# Altium PCB 28Pins_Schematic_V1I1_PCB.PcbDoc (part 1 of 5)
Units mm, origin at the board's own origin, x right, y up, seen from the top; angles counter-clockwise.
Board outline 68.58 x 53.34 mm, 2 copper layers (L1, L2), stack 1.67 mm thick; 106 components, 72 nets, 323 pads, 86 vias.
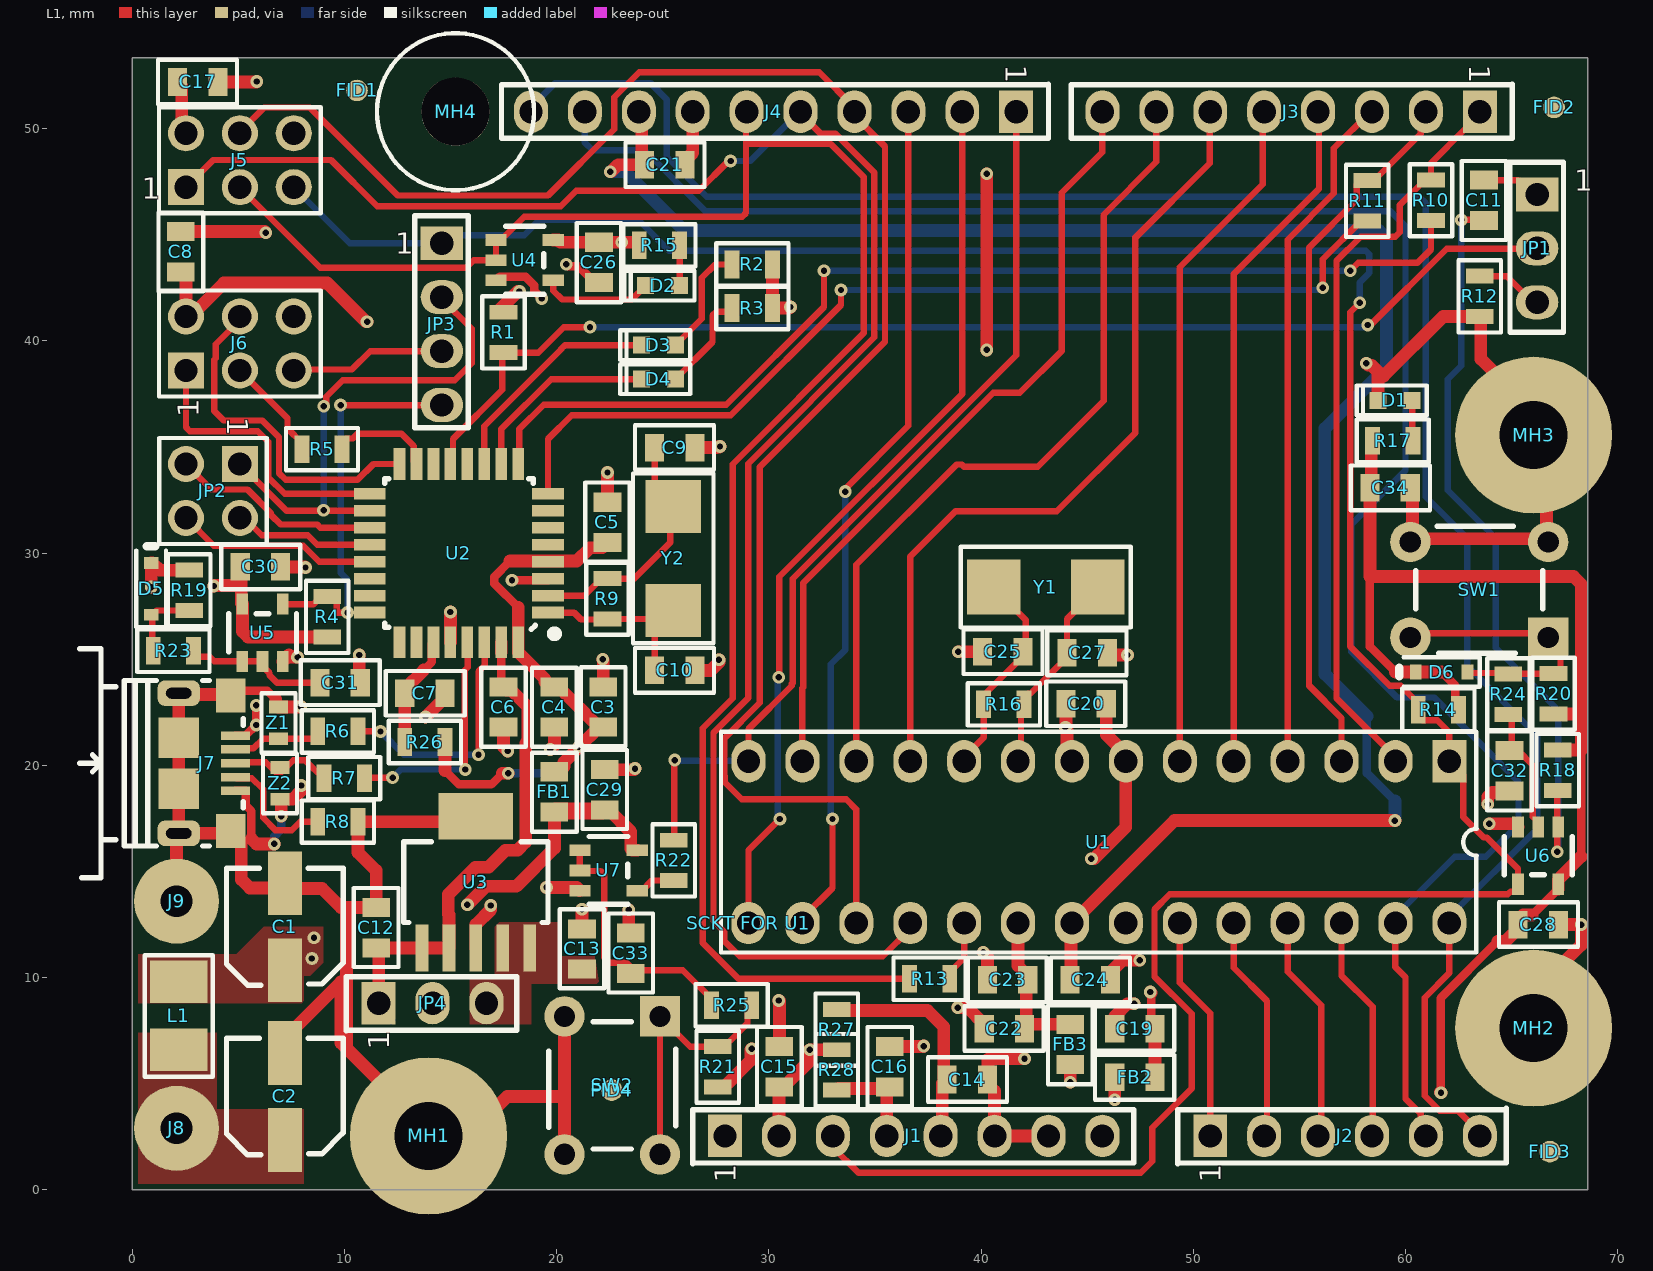
[diagram p0: L1 view]
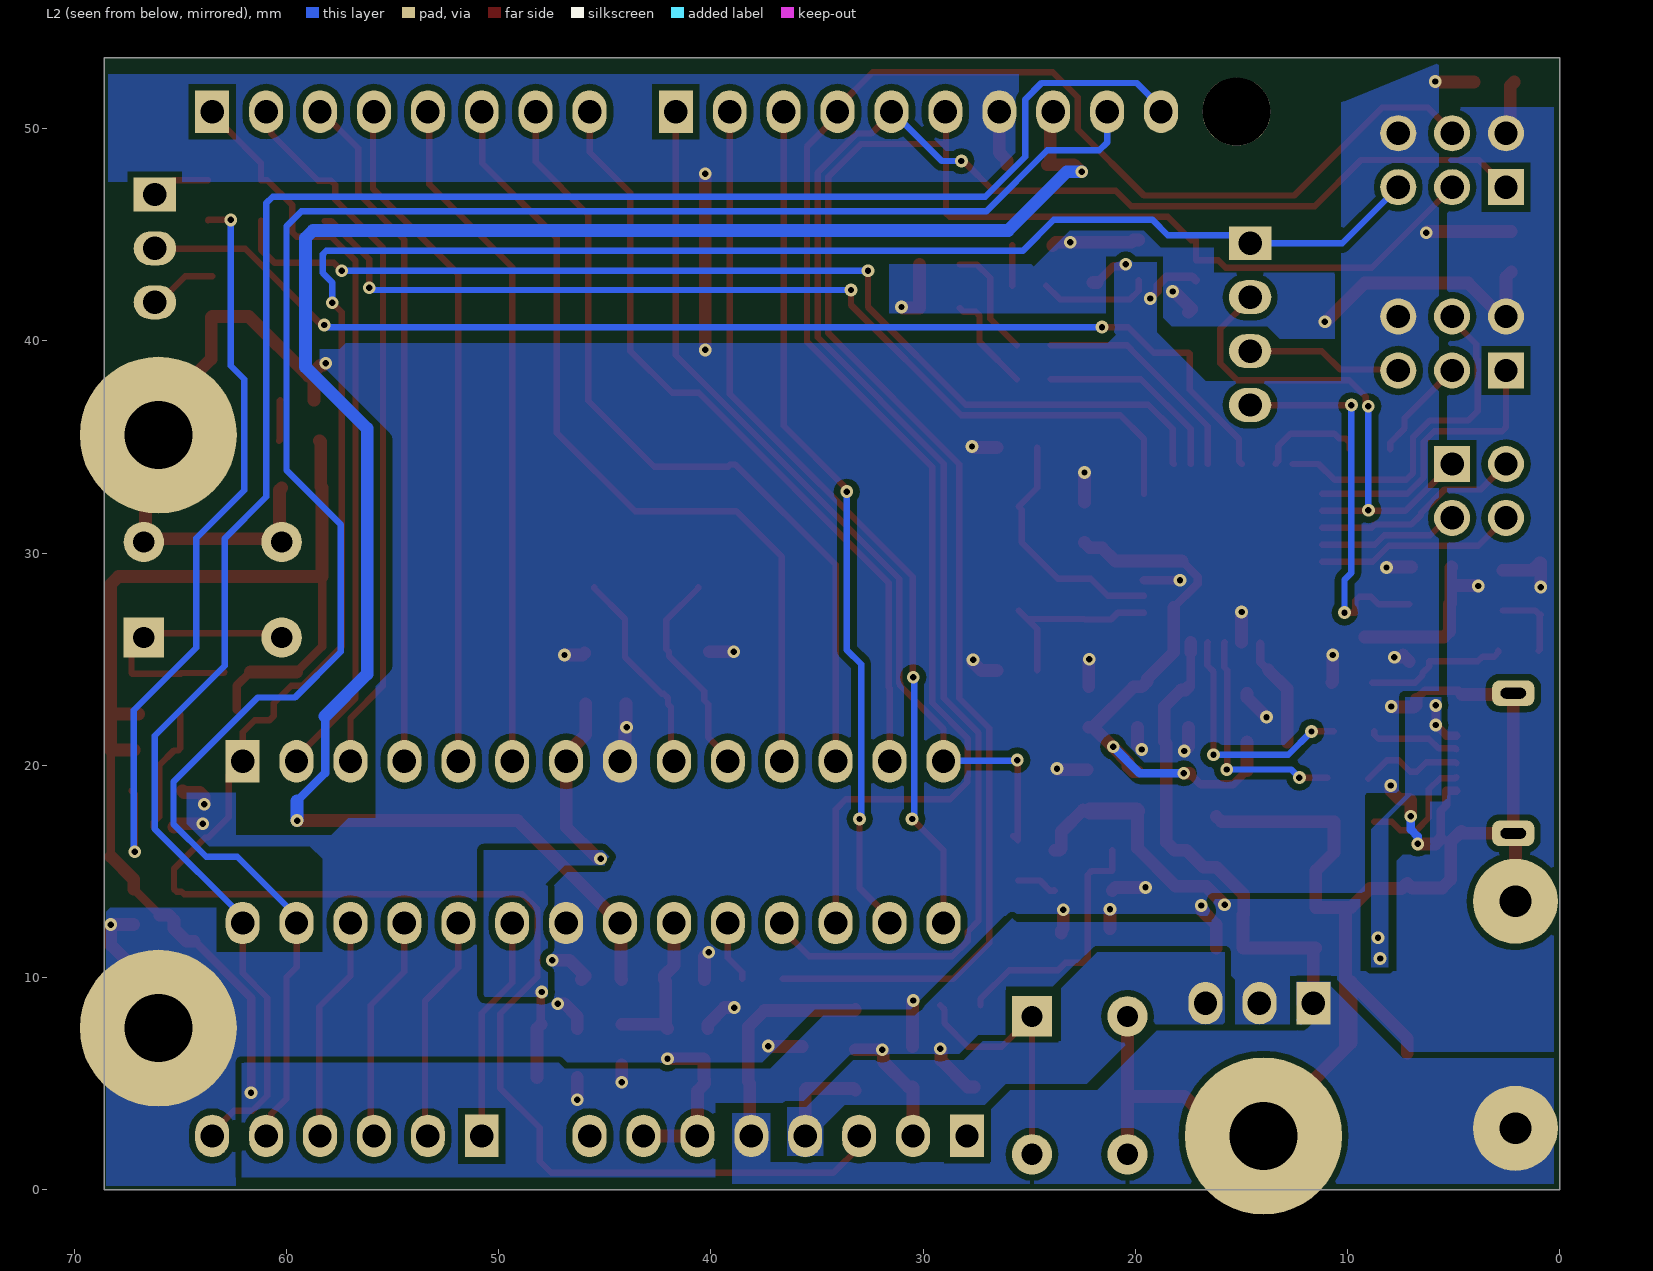
[diagram p1: L2 view, seen from below]

## Layer stack, top to bottom
Top Solder: solder mask 0.0102, Solder Resist, Dk 3.5
L1: signal copper 0.035
Dielectric 1: dielectric 1.6, FR-4, Dk 4.8
L2: signal copper 0.035
Bottom Solder: solder mask 0.0102, Solder Resist, Dk 3.5

## Board outline
0,0 68.58,0 68.58,53.34 0,53.34

## Design rules (kind name [scope] priority, off if disabled: settings)
Clearance "Around Polygon" [IsRegion] p1: gap=0.3 ignorepadtopadclearanceinfootprint=FALSE
Clearance [All] p2: gap=0.2 ignorepadtopadclearanceinfootprint=FALSE
ComponentClearance "DIP U1 and SCKT U1" [InComponent('U1') vs InComponent('SCKT FOR U1')] p1: gap=0 collisioncheckmode=3 verticalgap=0 showdistances=FALSE
ComponentClearance "MH4 to FID1" [InComponent('MH4') vs InComponent('FID1')] p2: gap=0 collisioncheckmode=3 verticalgap=0 showdistances=FALSE
ComponentClearance "MH2 and SCKT U1" [InComponent('MH2') vs InComponent('SCKT FOR U1')] p3: gap=0 collisioncheckmode=3 verticalgap=0 showdistances=FALSE
ComponentClearance "J2 and MH2" [InComponent('J2') vs InComponent('MH2')] p4: gap=0 collisioncheckmode=3 verticalgap=0 showdistances=FALSE
ComponentClearance "SW2 and FID4" [InComponent('SW2') vs InComponent('FID4')] p5: gap=0 collisioncheckmode=3 verticalgap=0 showdistances=FALSE
ComponentClearance "J5 and FID1" [InComponent('J5') vs InComponent('FID1')] p6: gap=0 collisioncheckmode=3 verticalgap=0 showdistances=FALSE
ComponentClearance "SW2 and FID1" [InComponent('SW2') vs InComponent('FID1')] p7: gap=0 collisioncheckmode=3 verticalgap=0 showdistances=FALSE
ComponentClearance "Power Resistors" [InComponent('R27') vs InComponent('R28')] p8: gap=0 collisioncheckmode=3 verticalgap=0 showdistances=FALSE
ComponentClearance "MH4 to FID4 and J4" [InComponent('MH4') vs InComponent('FID4')or InComponent('J4')] p9: gap=0 collisioncheckmode=3 verticalgap=0 showdistances=FALSE
ComponentClearance [All] p10: gap=0.2 collisioncheckmode=3 verticalgap=0.2 showdistances=FALSE
ComponentClearance "DIP SOCKET to MH2 and U1" [InComponent ('SCKT FOR U1') vs InComponent('MH2')or InComponent('U1')] p11: gap=0 collisioncheckmode=3 verticalgap=0 showdistances=FALSE
ComponentClearance "MH2 to J2" [InComponent('MH2') vs InComponent('J2')] p12: gap=0 collisioncheckmode=3 verticalgap=0 showdistances=FALSE
HoleSize [All] p1: absolutevalues=TRUE maxlimit=10 minlimit=0.2 maxpercent=80.000 minpercent=20.000
HoleToHoleClearance [All] p1: gap=0.3 allowstackedmicrovias=TRUE
MinimumSolderMaskSliver [All] p1: minsoldermaskwidth=0.1
PolygonConnect [All] p1: connectstyle=Direct reliefconductorwidth=0.254 reliefentries=4 polygonreliefangle="90 Angle" airgapwidth=0.254
RoutingVias [All] p1: holewidth=0.3 width=0.6 viastyle="Through Hole" minholewidth=0.3 minwidth=0.6 maxholewidth=0.3 maxwidth=0.6
SilkToSilkClearance [All] p1: silktosilkclearance=0.1
SilkToSolderMaskClearance [IsPad] p1: minsilkscreentomaskgap=0.1 clearancetoexposedcopper=TRUE
SolderMaskExpansion [All] p1: expansion=0.1 istentingtop=FALSE
Width "Width POWERS" [InNet('+*') or InNet('GND')or InNet('NetC8_2')] p1: maxlimit=0.8 minlimit=0.4 preferedwidth=0.4
Width [All] p2: maxlimit=0.5 minlimit=0.3 preferedwidth=0.3
24 further rules are at their usual default settings.

## Components (designator, comment, footprint, x,y, rotation, side; value= is the part's Value field where it differs from the comment)
C1 "100uf/10V" C_ALU_C_SIZE 7.2,12.4 r90 top
C2 "100uf/10V" C_ALU_C_SIZE 7.2,4.4 r90 top
C3 "10uf/16V" C0805 22.2,22.75 r270 top
C4 "100n" C0805 19.9,22.75 r90 top
C5 "100n" C0805 22.4,31.45 r270 top
C6 "100n" C0805 17.5,22.75 r90 top
C7 "1uF" C0805 13.8,23.4 r180 top
C8 "100n" C0805 2.3,44.2 r90 top
C9 "18p" C0805 25.575,34.975 r0 top
C10 "18p" C0805 25.575,24.475 r0 top
C11 "100n" C0805 63.7,46.625 r90 top
C12 "10uf/16V" C0805 11.5,12.35 r270 top
C13 "10uf/16V" C0805 21.2,11.35 r270 top
C14 "100n" C0805 39.35,5.2 r180 top
C15 "100n" C0805 30.5,5.8 r270 top
C16 "100n" C0805 35.7,5.8 r270 top
C17 "100n" C0805 3.1,52.2 r0 top
C19 "10uf/16V" C0805 47.25,7.6 r0 top
C20 "100n" C0805 44.95,22.9 r0 top
C21 "10uf/16V" C0805 25.1,48.3 r180 top
C22 "10uf/16V" C0805 41.1,7.6 r0 top
C23 "100n" C0805 41.25,9.9 r0 top
C24 "100n" C0805 45.15,9.9 r180 top
C25 "18p" C0805 41.025,25.35 r180 top
C26 "100n" C0805 22,43.7 r90 top
C27 "18p" C0805 45,25.3 r0 top
C28 "100n" C0805 66.25,12.5 r180 top
C29 "100n" C0805 22.275,18.85 r270 top
C30 "100n" C0805 6.05,29.35 r180 top
C31 "100n" C0805 9.8,23.9 r180 top
C32 "100n" C0805 64.9,19.75 r90 top
C33 "100n" C0805 23.5,11.15 r270 top
C34 "10uf/16V" C0805 59.275,33.075 r180 top
D1 "green" LED_0603 59.5,37.2 r0 top
D2 "Orange" LED_0603 25,42.6 r0 top
D3 "Orange" LED_0603 24.8,39.8 r0 top
D4 "Orange" LED_0603 24.8,38.2 r0 top
D5 "BAT54HT1G" SOD323 0.9,28.319 r270 top
D6 "BAT54HT1G" SOD323 61.7,24.4 r0 top
FB1 "MPZ2012S601AT000" C0805 19.9,18.75 r90 top
FB2 "MPZ2012S601AT000" C0805 47.25,5.3 r0 top
FB3 "MPZ2012S601AT000" C0805 44.2,6.85 r90 top
FID1 "FID_1MM" FID_40X120 10.6,51.8 r0 top
FID2 "FID_1MM" FID_40X120 67,51 r90 top
FID3 "FID_1MM" FID_40X120 66.8,1.8 r90 top
FID4 "FID_1MM" FID_40X120 22.6,4.7 r90 top
J1 "HDR FEMALE 1x8 2.54mm" HDR_FEMALE_1X8_2.54MM 27.94,2.54 r90 top locked
J2 "HDR FEMALE 1x6 2.54mm" HDR_FEMALE_1X6_2.54MM 50.8,2.54 r90 top locked
J3 "HDR FEMALE 1x8 2.54mm" HDR_FEMALE_1X8_2.54MM 63.5,50.8 r270 top locked
J4 "HDR FEMALE 1x10 2.54mm" HDR_FEMALE_1X10_2.54MM 41.656,50.8 r270 top locked
J5 "HDR 2x3" HDR_2X3_2.54MM 2.54,47.244 r90 top locked
J6 "HDR 2x3" HDR_2X3_2.54MM 2.54,38.608 r90 top locked
J7 "10118193-0001LF" 10118193 3.537,20.1 r270 top locked
J8 "4MMx1.5MM" PAD_WITH_HOLW_4MMX1.5MM 2.1,2.9 r0 top
J9 "4MMx1.5MM" PAD_WITH_HOLW_4MMX1.5MM 2.1,13.6 r0 top
JP1 "HDR_1x3" HDR_FEMALE_1X3_2.54MM 66.2,46.9 r0 top locked
JP2 "HDR_2x2" HDR_2X2_2.54MM 5.08,34.2 r270 top locked
JP3 "HDR_1x4" HDR_1X4_2.54MM 14.6,44.6 r0 top
JP4 "HDR_1x3" HDR_FEMALE_1X3_2.54MM 11.62,8.8 r90 top locked
L1 "2u2/2A" C1210_IND 2.2,8.2 r270 top
MH1 "MH_7.4MMC_3.2MMD" MH_7.4MMC_3.2MMD 13.97,2.54 r0 top locked
MH2 "MH_7.4MMC_3.2MMD" MH_7.4MMC_3.2MMD 66.04,7.62 r0 top locked
MH3 "MH_7.4MMC_3.2MMD" MH_7.4MMC_3.2MMD 66.04,35.56 r0 top locked
MH4 "MH_7.4MMNC_3.2MMD" MH_7.4MMD_3.2MMD_NONCOPPER_NPTH 15.24,50.8 r0 top locked
R1 "100k" R0805 17.5,40.4 r270 top
R2 "560R" R0805 29.225,43.6 r180 top
R3 "560R" R0805 29.225,41.55 r180 top
R4 "10k" R0805 9.2,27 r270 top
R5 "22R" R0805 8.95,34.9 r180 top
R6 "22R" R0805 9.7,21.6 r0 top
R7 "22R" R0805 10,19.4 r0 top
R8 "0R" R0805 9.7,17.35 r0 top
R9 "1M" R0805 22.4,27.85 r90 top
R10 "1k" R0805 61.2,46.625 r90 top
R11 "1k" R0805 58.2,46.6 r90 top
R12 "1k" R0805 63.5,42.1 r90 top
R13 "22R" R0805 37.575,9.95 r180 top
R14 "10k" R0805 61.55,22.625 r0 top
R15 "560R" R0805 24.85,44.5 r0 top
R16 "1M" R0805 41.075,22.875 r180 top
R17 "560R" R0805 59.4,35.3 r180 top
R18 "10k" R0805 67.175,19.775 r90 top
R19 "10k" R0805 2.7,28.25 r90 top
R20 "10k" R0805 66.975,23.375 r270 top
R21 "10k" R0805 27.6,5.8 r270 top
R22 "560R" R0805 25.525,15.525 r90 top
R23 "22R" R0805 1.95,25.4 r0 top
R24 "22R" R0805 64.85,23.35 r270 top
R25 "22R" R0805 28.25,8.7 r180 top
R26 "0R" R0805 13.8,21.1 r180 top
R27 "0R" R0805 33.2,7.55 r270 top
R28 "0R" R0805 33.2,5.65 r270 top
"SCKT FOR U1" "28-DIP Socket" "28-DIP 7.62MM SCKT" 29.045,12.573 r90 top locked
SW1 "1825910-6" 1825910-6 63.475,28.275 r270 top
SW2 "1825910-6" 1825910-6 22.625,4.925 r0 top
U1 "ATMEGA328P-PU" 28_DIP_7.62MM 62.065,20.193 r270 top locked
U2 "ATMEGA16U2-AU" TQFP32 15.4,30 r180 top locked
U3 "TL1963A-33DCQR" "DCQ [R-PDSO-G6]" 16.2,14.5 r90 top
U4 "SN74AHC1G09DBVR" DEV_SOT_23_5 18.5,43.8 r0 top
U5 "SN74AHC1G09DBVR" DEV_SOT_23_5 6.15,26.25 r90 top
U6 "SN74AHC1G09DBVR" DEV_SOT_23_5 66.25,15.75 r270 top
U7 "SN74AHC1G09DBVR" DEV_SOT_23_5 22.45,15.05 r0 top
Y1 "ABM7-16.000MHZ-D2Y-T" ABM7_V1_1_BIG 43.05,28.4 r180 top
Y2 "ABM7-16.000MHZ-D2Y-T" ABM7_V1_1_BIG 25.5,29.75 r90 top
Z1 "CG0603MLC-05E" R0603 6.9,22 r270 top
Z2 "CG0603MLC-05E" R0603 6.975,19.15 r90 top

## Footprints (in the part's own frame and the unit in brackets; to place one, negate y for a bottom-side part, rotate by r counter-clockwise, add the part's x,y. Pads: shape width x height; smd on the part's side, far side on the other; paste and mask are expansions set on the pad)
"28-DIP 7.62MM SCKT" [mm]
  body extent -1.2,-34.25 8.9,1.25, height 2.8
28_DIP_7.62MM [mm]
  rect 2x1.6 hole 1.1: 1(0,0)
  oval 2x1.6 hole 1.1: 2(0,-2.54) 3(0,-5.08) 4(0,-7.62) 5(0,-10.16) 6(0,-12.7) 7(0,-15.24) 8(0,-17.78) 9(0,-20.32) 10(0,-22.86) 11(0,-25.4) 12(0,-27.94) 13(0,-30.48) 14(0,-33.02) 15(7.62,-33.02) 16(7.62,-30.48) 17(7.62,-27.94) 18(7.62,-25.4) 19(7.62,-22.86) 20(7.62,-20.32) 21(7.62,-17.78) 22(7.62,-15.24) 23(7.62,-12.7) 24(7.62,-10.16) 25(7.62,-7.62) 26(7.62,-5.08) 27(7.62,-2.54) 28(7.62,0)
  silkscreen extent -1.39,-34.31 9.01,1.29, body extent -0.76,-34.21 8.38,0.99, height 7.5
1825910-6 [mm]
  rect 1.9x1.9 hole 1: 1(2.25,3.25)
  round 1.9 hole 1: 2(2.25,-3.25) 3(-2.25,3.25) 4(-2.25,-3.25)
  silkscreen extent -3,-3 3,3, body extent -2.99,-3.9 3,3.9, height 5
10118193 [mm]
  rect 0.4x1.35 smd mask+0.05: 1(-1.3,1.338) 2(-0.65,1.338) 3(0,1.338) 4(0.65,1.338) 5(1.3,1.338)
  rect 1.6x1.4 smd: 6(-3.2,1.112) 7(3.2,1.112)
  rrect60% 1.2x2 hole 0.5 slot 1.2 at 90 deg mask+0.05: 8(-3.3,-1.338) 9(3.3,-1.338)
  rect 1.9x1.9 smd: 10(-1.2,-1.338) 11(1.2,-1.338)
  silkscreen extent -5.4,-6 5.4,1.7, body extent -3.93,-3.96 3.93,1.7, height 2.71
ABM7_V1_1_BIG [mm]
  rect 2.5x2.6 smd: 1(-2.45,0) 2(2.45,0)
  silkscreen extent -4,-1.9 4,1.9, body extent -3,-1.75 3,1.75, height 1.41
C0805 [mm]
  rect 0.9x1.3 smd: 1(-0.95,0) 2(0.95,0)
  silkscreen extent -1.88,-1.05 1.85,1.05, body extent -1.02,-0.7 0.97,0.55, height 1.75
C1210_IND [mm]
  rect 2x2.7 smd: 1(-1.6,0) 2(1.6,0)
  silkscreen extent -2.85,-1.6 2.88,1.6, body extent -1.6,-1.25 1.6,3.25, height 5.41
C_ALU_C_SIZE [mm]
  rect 3x1.6 smd: 1(-2.05,0) 2(2.05,0)
  silkscreen extent -2.75,-2.75 2.75,2.75, body extent -2.95,-2.65 2.95,2.65, height 5.41
"DCQ [R-PDSO-G6]" [mm]
  rect 2.2x0.6 smd: 1(-3.1,2.54) 2(-3.1,1.27) 3(-3.1,0) 4(-3.1,-1.27) 5(-3.1,-2.54)
  rect 2.2x3.5 smd: 6(3.1,0)
  silkscreen extent -1.9,-3.4 1.9,3.4, body extent -3.69,-3.29 3.57,3.26, height 1.79
DEV_SOT_23_5 [mm]
  rect 1x0.55 smd: 1(-1.35,0.95) 2(-1.35,0) 3(-1.35,-0.95) 4(1.35,-0.95) 5(1.35,0.95)
  silkscreen extent -0.9,-1.6 0.9,1.6, body extent -1.51,-1.5 1.51,1.5, height 1.31
FID_40X120 [mil]
  round 40 smd paste-40 mask+40: 1(0,0)
HDR_1X4_2.54MM [mm]
  rect 2x1.6 hole 1.1: 1(0,0)
  oval 2x1.6 hole 1.1: 2(0,-2.54) 3(0,-5.08) 4(0,-7.62)
  silkscreen extent -1.28,-8.7 1.24,1.3, body extent -1.22,-8.7 1.19,1.06, height 8.3
HDR_2X2_2.54MM [mm]
  rect 1.7x1.7 hole 1.1: 1(0,0)
  round 1.7 hole 1.1: 2(2.54,0) 3(0,-2.54) 4(2.54,-2.54)
  silkscreen extent -1.23,-3.8 3.77,1.27, body extent -1.23,-3.81 3.77,1.27, height 8
HDR_2X3_2.54MM [mm]
  rect 1.7x1.7 hole 1.1: 1(0,0)
  round 1.7 hole 1.1: 2(2.54,0) 3(0,-2.54) 4(2.54,-2.54) 5(0,-5.08) 6(2.54,-5.08)
  silkscreen extent -1.23,-6.35 3.77,1.27, body extent -1.23,-6.35 3.77,1.27, height 8
HDR_FEMALE_1X3_2.54MM [mm]
  rect 2x1.6 hole 1.1: 1(0,0)
  oval 2x1.6 hole 1.1: 2(0,-2.54) 3(0,-5.08)
  silkscreen extent -1.31,-6.5 1.24,1.53, body extent -1.27,-6.35 1.27,1.27, height 6.31
HDR_FEMALE_1X6_2.54MM [mm]
  rect 2x1.6 hole 1.1: 1(0,0)
  oval 2x1.6 hole 1.1: 2(0,-2.54) 3(0,-5.08) 4(0,-7.62) 5(0,-10.16) 6(0,-12.7)
  silkscreen extent -1.31,-13.95 1.32,1.53, body extent -1.3,-13.83 1.24,1.41, height 8.51
HDR_FEMALE_1X8_2.54MM [mm]
  rect 2x1.6 hole 1.1: 1(0,0)
  oval 2x1.6 hole 1.1: 2(0,-2.54) 3(0,-5.08) 4(0,-7.62) 5(0,-10.16) 6(0,-12.7) 7(0,-15.24) 8(0,-17.78)
  silkscreen extent -1.31,-19.25 1.24,1.53, body extent -1.27,-19.05 1.27,1.27, height 8.4
HDR_FEMALE_1X10_2.54MM [mm]
  rect 2x1.6 hole 1.1: 1(0,0)
  oval 2x1.6 hole 1.1: 2(0,-2.54) 3(0,-5.08) 4(0,-7.62) 5(0,-10.16) 6(0,-12.7) 7(0,-15.24) 8(0,-17.78) 9(0,-20.32) 10(0,-22.86)
  silkscreen extent -1.31,-24.25 1.25,1.53, body extent -1.29,-24.02 1.25,1.38, height 8.51
LED_0603 [mm]
  rect 0.8x0.8 smd: 1(-0.8,0) 2(0.8,0)
  silkscreen extent -1.8,-0.7 1.5,0.7, body extent -0.83,-0.36 0.83,0.37, height 0.68
MH_7.4MMC_3.2MMD [mm]
  round 7.4 hole 3.2: 1(0,0)
MH_7.4MMD_3.2MMD_NONCOPPER_NPTH [mm]
  round 3.2 hole 3.2 unplated: 1(0,0)
  silkscreen extent -3.7,-3.7 3.7,3.7
PAD_WITH_HOLW_4MMX1.5MM [mm]
  round 4 hole 1.5: 1(0,0)
R0603 [mm]
  rect 0.6x0.9 smd: 1(-0.75,0) 2(0.75,0)
  silkscreen extent -1.4,-0.8 1.4,0.8, body extent -0.79,-0.41 0.81,0.43, height 0.8
R0805 [mm]
  rect 0.7x1.3 smd: 1(-0.95,0) 2(0.95,0)
  silkscreen extent -1.7,-1 1.7,1, body extent -1,-0.6 1,0.6, height 0.71
SOD323 [mil]
  rect 22x27 smd: 1(-48,0) 2(48,0)
  silkscreen extent -79,-28 71,28, body extent -51,-27 51,27, height 40
TQFP32 [mm]
  rect 1.5x0.55 smd mask+0.06: 1(-4.2,2.8) 2(-4.2,2) 3(-4.2,1.2) 4(-4.2,0.4) 5(-4.2,-0.4) 6(-4.2,-1.2) 7(-4.2,-2) 8(-4.2,-2.8) 17(4.2,-2.8) 18(4.2,-2) 19(4.2,-1.2) 20(4.2,-0.4) 21(4.2,0.4) 22(4.2,1.2) 23(4.2,2) 24(4.2,2.8)
  rect 0.55x1.5 smd mask+0.06: 9(-2.8,-4.2) 10(-2,-4.2) 11(-1.2,-4.2) 12(-0.4,-4.2) 13(0.4,-4.2) 14(1.2,-4.2) 15(2,-4.2) 16(2.8,-4.2) 25(2.8,4.2) 26(2,4.2) 27(1.2,4.2) 28(0.4,4.2) 29(-0.4,4.2) 30(-1.2,4.2) 31(-2,4.2) 32(-2.8,4.2)
  silkscreen extent -4.6,-3.5 3.5,3.9, body extent -4.55,-4.57 4.65,4.62, height 1.1

## Part data
C1 C2: library part EEE-1AA101WR, "Radial Can - SMD ALUMINUM ELECTROLYTIC CAPACITOR S 10V 100muF ±20% 0.197Dia 5.00mm", Capacitance=100µF, Case/Package=Radial, Leakage Current=10µA, Manufacturer=Panasonic, Max Operating Temperature=85°C, Min Operating Temperature=-40°C, Ripple Current=50mA, Supplier Part Number 1=PCE3867CT-ND, Tolerance=20%, Voltage Rating=10V, Category="Aluminum Electrolytic Capacitors", ComponentLink1Description=https://datasheet.octopart.com:443/EEE-1AA101WR-Panasonic-datasheet-62330071.pdf?src-supplier=Newark, ComponentLink1URL=https://datasheet.octopart.com:443/EEE-1AA101WR-Panasonic-datasheet-62330071.pdf?src-supplier=Newark, ComponentLink2Description=https://datasheet.octopart.com:443/EEE-1AA101WR-Panasonic-datasheet-5314063.pdf?src-supplier=Newark, ComponentLink2URL=https://datasheet.octopart.com:443/EEE-1AA101WR-Panasonic-datasheet-5314063.pdf?src-supplier=Newark, ComponentLink3Description=https://datasheet.octopart.com:443/EEE-1AA101WR-Panasonic-datasheet-41169183.pdf?src-supplier=Newark, ComponentLink3URL=https://datasheet.octopart.com:443/EEE-1AA101WR-Panasonic-datasheet-41169183.pdf?src-supplier=Newark, ComponentLink4Description=https://datasheet.octopart.com:443/EEE-1AA101WR-Panasonic-datasheet-13265900.pdf?src-supplier=RS+(Formerly+Allied+Electronics), ComponentLink4URL=https://datasheet.octopart.com:443/EEE-1AA101WR-Panasonic-datasheet-13265900.pdf?src-supplier=RS+(Formerly+Allied+Electronics), ComponentLink5Description=https://datasheet.octopart.com:443/EEE-1AA101WR-Panasonic-datasheet-34230028.pdf?src-supplier=element14+APAC, ComponentLink5URL=https://datasheet.octopart.com:443/EEE-1AA101WR-Panasonic-datasheet-34230028.pdf?src-supplier=element14+APAC, ComponentLink6Description=https://datasheet.octopart.com:443/EEE-1AA101WR-Panasonic-datasheet-154766114.pdf?src-supplier=Master+Electronics, ComponentLink6URL=https://datasheet.octopart.com:443/EEE-1AA101WR-Panasonic-datasheet-154766114.pdf?src-supplier=Master+Electronics, ComponentLink7Description=https://datasheet.octopart.com:443/EEE-1AA101WR-Panasonic-datasheet-11548988.pdf?src-supplier=Arrow+Electronics, ComponentLink7URL=https://datasheet.octopart.com:443/EEE-1AA101WR-Panasonic-datasheet-11548988.pdf?src-supplier=Arrow+Electronics, ComponentLink8Description=https://datasheet.octopart.com:443/EEE1AA101WR-Panasonic-datasheet-150469818.pdf?src-supplier=TME, ComponentLink8URL=https://datasheet.octopart.com:443/EEE1AA101WR-Panasonic-datasheet-150469818.pdf?src-supplier=TME, ComponentLink9Description=https://sigma.octopart.com:443/150570760/technical_drawing/Panasonic-EEE1AA101WR.pdf?src-supplier=Panasonic+SCT, ComponentLink9URL=https://sigma.octopart.com:443/150570760/technical_drawing/Panasonic-EEE1AA101WR.pdf?src-supplier=Panasonic+SCT, ComponentLink10Description=https://datasheet.octopart.com:443/EEE-1AA101WR-Panasonic-datasheet-6019.pdf?src-supplier=DigiKey, ComponentLink10URL=https://datasheet.octopart.com:443/EEE-1AA101WR-Panasonic-datasheet-6019.pdf?src-supplier=DigiKey, Contact Plating=Tin, Diameter=5mm, Dissipation Factor=30%, Height=5.4mm, Height - Seated (Max)=5.4102mm, Lead Free="Lead Free", Length=5.3mm, Life (Hours)=1000hours, Lifecycle Status=NRND, Manufacturer Part Number=EEE-1AA101WR, Mount="Surface Mount", Number of Terminals=2, Packaging="Cut Tape", Pricing 1="1=0.36, 10=0.22, 50=0.1606, 100=0.1419, 500=0.10952 (USD)", Radiation Hardening=No, REACH SVHC=Yes, Ripple Current (AC)=50mA, RoHS=Compliant, Schedule B="8532220020, 8532220020|8532220020|8532220020|8532220020|8532220020", Stock 1=17448, Supplier 1=DigiKey, Termination=SMD/SMT, Voltage Rating (DC)=10V, Width=5.3mm
C3 C12 C13 C19 C21 C22 C34: library part C2012X5R1C106M085AC, "C Series 0805 10 uF 16 V ±20 % Tolerance X5R SMT Multilayer Ceramic Capacitor", Capacitance=10µF, Case Code (Imperial)=0805, Case Code (Metric)=2012, Dielectric=X5R, Dielectric Material=Ceramic, Manufacturer=TDK, Manufacturer Lifecycle Status="PRODUCTION (NOT RECOMMENDED FOR NEW DESIGN)", Max Operating Temperature=85°C, Min Operating Temperature=-55°C, Supplier Part Number 1=445-7645-1-ND, Tolerance=20%, Voltage=16V, Case/Package=0805, Category="Ceramic Capacitors", China RoHS=Compliant, ComponentLink1Description=https://datasheet.octopart.com:443/C2012X5R1C106M085AC-TDK-datasheet-175423548.pdf?src-supplier=IHS, ComponentLink1URL=https://datasheet.octopart.com:443/C2012X5R1C106M085AC-TDK-datasheet-175423548.pdf?src-supplier=IHS, ComponentLink2Description=https://datasheet.octopart.com:443/C2012X5R1C106M085AC-TDK-datasheet-151546523.pdf?src-supplier=TDK, ComponentLink2URL=https://datasheet.octopart.com:443/C2012X5R1C106M085AC-TDK-datasheet-151546523.pdf?src-supplier=TDK, ComponentLink3Description=https://datasheet.octopart.com:443/C2012X5R1C106M085AC-TDK-datasheet-41194876.pdf?src-supplier=element14+APAC, ComponentLink3URL=https://datasheet.octopart.com:443/C2012X5R1C106M085AC-TDK-datasheet-41194876.pdf?src-supplier=element14+APAC, ComponentLink4Description=https://datasheet.octopart.com:443/C2012X5R1C106M085AC-TDK-datasheet-41169347.pdf?src-supplier=element14+APAC, ComponentLink4URL=https://datasheet.octopart.com:443/C2012X5R1C106M085AC-TDK-datasheet-41169347.pdf?src-supplier=element14+APAC, ComponentLink5Description=https://datasheet.octopart.com:443/C2012X5R1C106M085AC-TDK-datasheet-82475248.pdf?src-supplier=Newark, ComponentLink5URL=https://datasheet.octopart.com:443/C2012X5R1C106M085AC-TDK-datasheet-82475248.pdf?src-supplier=Newark, ComponentLink6Description=https://datasheet.octopart.com:443/C2012X5R1C106M085AC-TDK-datasheet-13444418.pdf?src-supplier=Newark, ComponentLink6URL=https://datasheet.octopart.com:443/C2012X5R1C106M085AC-TDK-datasheet-13444418.pdf?src-supplier=Newark, ComponentLink7Description=https://datasheet.octopart.com:443/C2012X5R1C106M085AC-TDK-datasheet-23766614.pdf?src-supplier=Newark, ComponentLink7URL=https://datasheet.octopart.com:443/C2012X5R1C106M085AC-TDK-datasheet-23766614.pdf?src-supplier=Newark, ComponentLink8Description=https://datasheet.octopart.com:443/C2012X5R1C106M085AC-TDK-datasheet-20681607.pdf?src-supplier=Newark, ComponentLink8URL=https://datasheet.octopart.com:443/C2012X5R1C106M085AC-TDK-datasheet-20681607.pdf?src-supplier=Newark, ComponentLink9Description=https://datasheet.octopart.com/C-Series-Ceramic-Chip-Capacitors-TDK-datasheet-family-84.pdf, ComponentLink9URL=https://datasheet.octopart.com/C-Series-Ceramic-Chip-Capacitors-TDK-datasheet-family-84.pdf, ComponentLink10Description=https://datasheet.octopart.com:443/C2012X5R1C106M085AC-TDK-datasheet-12509848.pdf?src-supplier=Future+Electronics, ComponentLink10URL=https://datasheet.octopart.com:443/C2012X5R1C106M085AC-TDK-datasheet-12509848.pdf?src-supplier=Future+Electronics, ComponentLink11Description=https://datasheet.octopart.com:443/C2012X5R1C106M085AC-TDK-datasheet-10978788.pdf?src-supplier=Future+Electronics, ComponentLink11URL=https://datasheet.octopart.com:443/C2012X5R1C106M085AC-TDK-datasheet-10978788.pdf?src-supplier=Future+Electronics, ComponentLink12Description=https://datasheet.octopart.com:443/C2012X5R1C106M085AC-TDK-datasheet-8852320.pdf?src-supplier=Future+Electronics, ComponentLink12URL=https://datasheet.octopart.com:443/C2012X5R1C106M085AC-TDK-datasheet-8852320.pdf?src-supplier=Future+Electronics, ComponentLink13Description=https://datasheet.octopart.com:443/C2012X5R1C106M085AC-TDK-datasheet-8359770.pdf?src-supplier=Future+Electronics, ComponentLink13URL=https://datasheet.octopart.com:443/C2012X5R1C106M085AC-TDK-datasheet-8359770.pdf?src-supplier=Future+Electronics, ComponentLink14Description=https://datasheet.octopart.com:443/C2012X5R1C106M085AC-TDK-datasheet-8324322.pdf?src-supplier=Future+Electronics, ComponentLink14URL=https://datasheet.octopart.com:443/C2012X5R1C106M085AC-TDK-datasheet-8324322.pdf?src-supplier=Future+Electronics, ComponentLink15Description=https://datasheet.octopart.com:443/C2012X5R1C106M085AC-TDK-datasheet-128946.pdf?src-supplier=Future+Electronics, ComponentLink15URL=https://datasheet.octopart.com:443/C2012X5R1C106M085AC-TDK-datasheet-128946.pdf?src-supplier=Future+Electronics, ComponentLink16Description=http://sigma.octopart.com:80/rohs_certificate/C-Series-Ceramic-Chip-Capacitors-TDK-family-108.pdf?src-supplier=Compliance+Statements, ComponentLink16URL=http://sigma.octopart.com:80/rohs_certificate/C-Series-Ceramic-Chip-Capacitors-TDK-family-108.pdf?src-supplier=Compliance+Statements, Composition=Ceramic, Depth=1.25mm, Height=850µm, Lead Free="Lead Free", Length=2mm, Lifecycle Status=NRND, Manufacturer Part Number=C2012X5R1C106M085AC, Material=Ceramic, Max Length=2.2mm, Max Width=1.45mm, Min Length=1.8mm, Min Width=1.05mm, Mount="Surface Mount", Number of Pins=2, Number of Terminals=2, Pricing 1="1=0.21, 10=0.121, 50=0.0866, 100=0.076, 500=0.05824, 1000=0.05277 (USD)", REACH SVHC=Yes, RoHS=Compliant, Schedule B="8532240020, 8532240020|8532240020, 8532240020|8532240020|8532240020, 8532240020|8532240020|8532240020|8532240020", Stock 1=323340, Supplier 1=DigiKey, Termination=SMD/SMT, Voltage Rating=16V, Voltage Rating (DC)=16V, Weight=5.499807mg, Width=1.25mm
C4 C5 C6 C8 C11 C14 C15 C16 C17 C20 C23 C24 C26 C28 C29 C30 C31 C32 C33: library part C2012X7R1H104K085AA, "C Series 0805 0.1 uF 50 V ±10 % Tolerance X7R SMT Multilayer Ceramic Capacitor", Capacitance=100nF, Case Code (Imperial)=0805, Case Code (Metric)=2012, Dielectric=X7R, Dielectric Material=Ceramic, Manufacturer=TDK, Manufacturer Lifecycle Status="PRODUCTION (NOT RECOMMENDED FOR NEW DESIGN)", Max Operating Temperature=125°C, Min Operating Temperature=-55°C, Supplier Part Number 1=445-7534-6-ND, Tolerance=10%, Voltage=50V, Case/Package=0805, Category="Ceramic Capacitors", China RoHS=Compliant, ComponentLink1Description=https://datasheet.octopart.com:443/C2012X7R1H104K085AA-TDK-datasheet-175423548.pdf?src-supplier=IHS, ComponentLink1URL=https://datasheet.octopart.com:443/C2012X7R1H104K085AA-TDK-datasheet-175423548.pdf?src-supplier=IHS, ComponentLink2Description=https://datasheet.octopart.com:443/C2012X7R1H104K085AA-TDK-datasheet-151546523.pdf?src-supplier=ODG+(Origin+Data+Global), ComponentLink2URL=https://datasheet.octopart.com:443/C2012X7R1H104K085AA-TDK-datasheet-151546523.pdf?src-supplier=ODG+(Origin+Data+Global), ComponentLink3Description=https://datasheet.octopart.com:443/C2012X7R1H104K085AA-TDK-datasheet-41194876.pdf?src-supplier=element14+APAC, ComponentLink3URL=https://datasheet.octopart.com:443/C2012X7R1H104K085AA-TDK-datasheet-41194876.pdf?src-supplier=element14+APAC, ComponentLink4Description=https://datasheet.octopart.com:443/C2012X7R1H104K085AA-TDK-datasheet-10978788.pdf?src-supplier=element14+APAC, ComponentLink4URL=https://datasheet.octopart.com:443/C2012X7R1H104K085AA-TDK-datasheet-10978788.pdf?src-supplier=element14+APAC, ComponentLink5Description=https://datasheet.octopart.com:443/C2012X7R1H104K085AA-TDK-datasheet-13376850.pdf?src-supplier=element14+APAC, ComponentLink5URL=https://datasheet.octopart.com:443/C2012X7R1H104K085AA-TDK-datasheet-13376850.pdf?src-supplier=element14+APAC, ComponentLink6Description=https://datasheet.octopart.com:443/C2012X7R1H104K085AA-TDK-datasheet-41169347.pdf?src-supplier=element14+APAC, ComponentLink6URL=https://datasheet.octopart.com:443/C2012X7R1H104K085AA-TDK-datasheet-41169347.pdf?src-supplier=element14+APAC, ComponentLink7Description=https://datasheet.octopart.com:443/C2012X7R1H104K085AA-TDK-datasheet-82475248.pdf?src-supplier=Newark, ComponentLink7URL=https://datasheet.octopart.com:443/C2012X7R1H104K085AA-TDK-datasheet-82475248.pdf?src-supplier=Newark, ComponentLink8Description=https://datasheet.octopart.com:443/C2012X7R1H104K085AA-TDK-datasheet-13444418.pdf?src-supplier=Newark, ComponentLink8URL=https://datasheet.octopart.com:443/C2012X7R1H104K085AA-TDK-datasheet-13444418.pdf?src-supplier=Newark, ComponentLink9Description=https://datasheet.octopart.com:443/C2012X7R1H104K085AA-TDK-datasheet-23766614.pdf?src-supplier=Newark, ComponentLink9URL=https://datasheet.octopart.com:443/C2012X7R1H104K085AA-TDK-datasheet-23766614.pdf?src-supplier=Newark, ComponentLink10Description=https://datasheet.octopart.com:443/C2012X7R1H104K085AA-TDK-datasheet-12509848.pdf?src-supplier=Future+Electronics, ComponentLink10URL=https://datasheet.octopart.com:443/C2012X7R1H104K085AA-TDK-datasheet-12509848.pdf?src-supplier=Future+Electronics, ComponentLink11Description=https://datasheet.octopart.com:443/C2012X7R1H104K085AA-TDK-datasheet-8852320.pdf?src-supplier=Future+Electronics, ComponentLink11URL=https://datasheet.octopart.com:443/C2012X7R1H104K085AA-TDK-datasheet-8852320.pdf?src-supplier=Future+Electronics, ComponentLink12Description=https://datasheet.octopart.com:443/C2012X7R1H104K085AA-TDK-datasheet-8359770.pdf?src-supplier=Future+Electronics, ComponentLink12URL=https://datasheet.octopart.com:443/C2012X7R1H104K085AA-TDK-datasheet-8359770.pdf?src-supplier=Future+Electronics, ComponentLink13Description=https://datasheet.octopart.com:443/C2012X7R1H104K085AA-TDK-datasheet-8324322.pdf?src-supplier=Future+Electronics, ComponentLink13URL=https://datasheet.octopart.com:443/C2012X7R1H104K085AA-TDK-datasheet-8324322.pdf?src-supplier=Future+Electronics, ComponentLink14Description=https://datasheet.octopart.com:443/C2012X7R1H104K085AA-TDK-datasheet-128946.pdf?src-supplier=Future+Electronics, ComponentLink14URL=https://datasheet.octopart.com:443/C2012X7R1H104K085AA-TDK-datasheet-128946.pdf?src-supplier=Future+Electronics, ComponentLink15Description=https://datasheet.octopart.com:443/C2012X7R1H104K085AA-TDK-datasheet-11730548.pdf?src-supplier=Electro+Sonic, ComponentLink15URL=https://datasheet.octopart.com:443/C2012X7R1H104K085AA-TDK-datasheet-11730548.pdf?src-supplier=Electro+Sonic, Composition=Ceramic, Depth=1.25mm, Height=850µm, Lead Free="Lead Free", Length=2mm, Lifecycle Status=NRND, Manufacturer Part Number=C2012X7R1H104K085AA, Material=Ceramic, Max Length=2.2mm, Max Width=1.45mm, Min Length=1.8mm, Min Width=1.05mm, Mount="Surface Mount", Number of Pins=2, Number of Terminals=2, Pricing 1="1=0.11, 10=0.06, 100=0.0379, 1000=0.02597 (USD)", Radiation Hardening=No, REACH SVHC=Yes, RoHS=Compliant, Schedule B="8532240020, 8532240020|8532240020|8532240020|8532240020|8532240020", Stock 1=1115838, Supplier 1=DigiKey, Termination=SMD/SMT, Voltage Rating=50V, Voltage Rating (DC)=50V, Weight=5.499807mg, Width=1.25mm
C7: library part C2012X5R1E105K125AA, "C Series 0805 1 uF 25 V ±10% Tolerance X5R SMT Multilayer Ceramic Capacitor", Capacitance=1µF, Case Code (Imperial)=0805, Case Code (Metric)=2012, Dielectric=X5R, Dielectric Material=Ceramic, Manufacturer=TDK, Manufacturer Lifecycle Status=PRODUCTION, Max Operating Temperature=85°C, Min Operating Temperature=-55°C, Supplier Part Number 1=445-1419-1-ND, Tolerance=10%, Voltage=25V, Case/Package=0805, Category="Ceramic Capacitors", China RoHS=Compliant, ComponentLink1Description=https://datasheet.octopart.com:443/C2012X5R1E105K125AA-TDK-datasheet-175423548.pdf?src-supplier=TME, ComponentLink1URL=https://datasheet.octopart.com:443/C2012X5R1E105K125AA-TDK-datasheet-175423548.pdf?src-supplier=TME, ComponentLink2Description=https://datasheet.octopart.com:443/C2012X5R1E105K125AA-TDK-datasheet-182135025.pdf?src-supplier=TME, ComponentLink2URL=https://datasheet.octopart.com:443/C2012X5R1E105K125AA-TDK-datasheet-182135025.pdf?src-supplier=TME, ComponentLink3Description=https://datasheet.octopart.com:443/C2012X5R1E105K125AA-TDK-datasheet-159617022.pdf?src-supplier=TME, ComponentLink3URL=https://datasheet.octopart.com:443/C2012X5R1E105K125AA-TDK-datasheet-159617022.pdf?src-supplier=TME, ComponentLink4Description=https://datasheet.octopart.com:443/C2012X5R1E105K125AA-TDK-datasheet-151546523.pdf?src-supplier=TDK, ComponentLink4URL=https://datasheet.octopart.com:443/C2012X5R1E105K125AA-TDK-datasheet-151546523.pdf?src-supplier=TDK, ComponentLink5Description=https://datasheet.octopart.com/C2012X5R1E105K125AA-TDK-datasheet-41194876.pdf, ComponentLink5URL=https://datasheet.octopart.com/C2012X5R1E105K125AA-TDK-datasheet-41194876.pdf, ComponentLink6Description=https://datasheet.octopart.com/C-Series-Ceramic-Chip-Capacitors-TDK-datasheet-family-84.pdf, ComponentLink6URL=https://datasheet.octopart.com/C-Series-Ceramic-Chip-Capacitors-TDK-datasheet-family-84.pdf, ComponentLink7Description=https://datasheet.octopart.com:443/C2012X5R1E105K125AA-TDK-datasheet-20681607.pdf?src-supplier=Newark, ComponentLink7URL=https://datasheet.octopart.com:443/C2012X5R1E105K125AA-TDK-datasheet-20681607.pdf?src-supplier=Newark, ComponentLink8Description=https://datasheet.octopart.com:443/C2012X5R1E105K125AA-TDK-datasheet-82475248.pdf?src-supplier=Newark, ComponentLink8URL=https://datasheet.octopart.com:443/C2012X5R1E105K125AA-TDK-datasheet-82475248.pdf?src-supplier=Newark, ComponentLink9Description=https://datasheet.octopart.com:443/C2012X5R1E105K125AA-TDK-datasheet-8852320.pdf?src-supplier=Newark, ComponentLink9URL=https://datasheet.octopart.com:443/C2012X5R1E105K125AA-TDK-datasheet-8852320.pdf?src-supplier=Newark, ComponentLink10Description=https://datasheet.octopart.com:443/C2012X5R1E105K125AA-TDK-datasheet-13376850.pdf?src-supplier=Newark, ComponentLink10URL=https://datasheet.octopart.com:443/C2012X5R1E105K125AA-TDK-datasheet-13376850.pdf?src-supplier=Newark, ComponentLink11Description=https://datasheet.octopart.com:443/C2012X5R1E105K125AA-TDK-datasheet-10921857.pdf?src-supplier=element14+APAC, ComponentLink11URL=https://datasheet.octopart.com:443/C2012X5R1E105K125AA-TDK-datasheet-10921857.pdf?src-supplier=element14+APAC, ComponentLink12Description=https://datasheet.octopart.com:443/C2012X5R1E105K125AA-TDK-datasheet-12509848.pdf?src-supplier=Future+Electronics, ComponentLink12URL=https://datasheet.octopart.com:443/C2012X5R1E105K125AA-TDK-datasheet-12509848.pdf?src-supplier=Future+Electronics, ComponentLink13Description=https://datasheet.octopart.com:443/C2012X5R1E105K125AA-TDK-datasheet-10978788.pdf?src-supplier=Future+Electronics, ComponentLink13URL=https://datasheet.octopart.com:443/C2012X5R1E105K125AA-TDK-datasheet-10978788.pdf?src-supplier=Future+Electronics, ComponentLink14Description=https://datasheet.octopart.com:443/C2012X5R1E105K125AA-TDK-datasheet-8359770.pdf?src-supplier=Future+Electronics, ComponentLink14URL=https://datasheet.octopart.com:443/C2012X5R1E105K125AA-TDK-datasheet-8359770.pdf?src-supplier=Future+Electronics, ComponentLink15Description=https://datasheet.octopart.com:443/C2012X5R1E105K125AA-TDK-datasheet-8324322.pdf?src-supplier=Future+Electronics, ComponentLink15URL=https://datasheet.octopart.com:443/C2012X5R1E105K125AA-TDK-datasheet-8324322.pdf?src-supplier=Future+Electronics, ComponentLink16Description=https://datasheet.octopart.com:443/C2012X5R1E105K125AA-TDK-datasheet-128946.pdf?src-supplier=Future+Electronics, ComponentLink16URL=https://datasheet.octopart.com:443/C2012X5R1E105K125AA-TDK-datasheet-128946.pdf?src-supplier=Future+Electronics, ComponentLink17Description=http://sigma.octopart.com:80/rohs_certificate/C-Series-Ceramic-Chip-Capacitors-TDK-family-108.pdf?src-supplier=Compliance+Statements, ComponentLink17URL=http://sigma.octopart.com:80/rohs_certificate/C-Series-Ceramic-Chip-Capacitors-TDK-family-108.pdf?src-supplier=Compliance+Statements, Composition=Ceramic, Depth=1.25mm, Height=1.25mm, Lead Free="Lead Free", Length=2mm, Lifecycle Status=Production, Manufacturer Part Number=C2012X5R1E105K125AA, Material=Ceramic, Max Length=2.2mm, Max Width=1.45mm, Min Length=1.8mm, Min Width=1.05mm, Mount="Surface Mount", Number of Pins=2, Number of Terminals=2, Pricing 1="1=0.19, 10=0.106, 50=0.0756, 100=0.0662, 500=0.05034, 1000=0.04546 (USD)", Radiation Hardening=No, REACH SVHC=Yes, RoHS=Compliant, Schedule B="8532240020, 8532240020|8532240020, 8532240020|8532240020|8532240020, 8532240020|8532240020|8532240020|8532240020", Stock 1=31009, Supplier 1=DigiKey, Termination=SMD/SMT, Voltage Rating=25V, Voltage Rating (DC)=25V, Weight=5.499807mg, Width=1.25mm
C9 C10 C25 C27: library part C0805C180J5GACTU, "SMD Comm C0G 0805 (2012Metric) Ceramic Capacitor 0.079Lx0.049W 2.00mmx1.25mm C0G NP0 ±5% 18pF", Capacitance=18pF, Case Code (Imperial)=0805, Dielectric=C0G, Dielectric Material=Ceramic, Manufacturer=KEMET, Max Operating Temperature=125°C, Min Operating Temperature=-55°C, Supplier Part Number 1=399-C0805C180J5GACTUCT-ND, Temperature Coefficient=30ppm/°C, Tolerance=5%, Voltage=50V, Case/Package=0805, Category="Ceramic Capacitors", China RoHS=Compliant, ComponentLink1Description=https://datasheet.octopart.com:443/C0805C180J5GACTU-KEMET-datasheet-178132257.pdf?src-supplier=IHS, ComponentLink1URL=https://datasheet.octopart.com:443/C0805C180J5GACTU-KEMET-datasheet-178132257.pdf?src-supplier=IHS, ComponentLink2Description=https://datasheet.octopart.com:443/C0805C180J5GACTU-KEMET-datasheet-68331921.pdf?src-supplier=element14+APAC, ComponentLink2URL=https://datasheet.octopart.com:443/C0805C180J5GACTU-KEMET-datasheet-68331921.pdf?src-supplier=element14+APAC, ComponentLink3Description=https://datasheet.octopart.com:443/C0805C180J5GACTU-Kemet-datasheet-10282724.pdf?src-supplier=element14+APAC, ComponentLink3URL=https://datasheet.octopart.com:443/C0805C180J5GACTU-Kemet-datasheet-10282724.pdf?src-supplier=element14+APAC, ComponentLink4Description=https://datasheet.octopart.com:443/C0805C180J5GACTU-KEMET-datasheet-176142321.pdf?src-supplier=element14+APAC, ComponentLink4URL=https://datasheet.octopart.com:443/C0805C180J5GACTU-KEMET-datasheet-176142321.pdf?src-supplier=element14+APAC, ComponentLink5Description=https://datasheet.octopart.com:443/C0805C180J5GACTU-KEMET-datasheet-176142314.pdf?src-supplier=element14+APAC, ComponentLink5URL=https://datasheet.octopart.com:443/C0805C180J5GACTU-KEMET-datasheet-176142314.pdf?src-supplier=element14+APAC, ComponentLink6Description=https://datasheet.octopart.com:443/C0805C180J5GACTU-KEMET-datasheet-149524055.pdf?src-supplier=Farnell, ComponentLink6URL=https://datasheet.octopart.com:443/C0805C180J5GACTU-KEMET-datasheet-149524055.pdf?src-supplier=Farnell, ComponentLink7Description=https://datasheet.octopart.com:443/C0805C180J5GACTU-Kemet-datasheet-21202491.pdf?src-supplier=Farnell, ComponentLink7URL=https://datasheet.octopart.com:443/C0805C180J5GACTU-Kemet-datasheet-21202491.pdf?src-supplier=Farnell, ComponentLink8Description=https://datasheet.octopart.com:443/C0805C180J5GACTU-KEMET-datasheet-101576200.pdf?src-supplier=Farnell, ComponentLink8URL=https://datasheet.octopart.com:443/C0805C180J5GACTU-KEMET-datasheet-101576200.pdf?src-supplier=Farnell, ComponentLink9Description=https://datasheet.octopart.com:443/C0805C180J5GACTU-Kemet-datasheet-7833651.pdf?src-supplier=Farnell, ComponentLink9URL=https://datasheet.octopart.com:443/C0805C180J5GACTU-Kemet-datasheet-7833651.pdf?src-supplier=Farnell, ComponentLink10Description=https://datasheet.octopart.com:443/C0805C180J5GACTU-Kemet-datasheet-7601896.pdf?src-supplier=Farnell, ComponentLink10URL=https://datasheet.octopart.com:443/C0805C180J5GACTU-Kemet-datasheet-7601896.pdf?src-supplier=Farnell, ComponentLink11Description=https://datasheet.octopart.com:443/C0805C180J5GACTU-Kemet-datasheet-5316294.pdf?src-supplier=Farnell, ComponentLink11URL=https://datasheet.octopart.com:443/C0805C180J5GACTU-Kemet-datasheet-5316294.pdf?src-supplier=Farnell, ComponentLink12Description=https://datasheet.octopart.com:443/C0805C180J5GACTU-Kemet-datasheet-5314837.pdf?src-supplier=Farnell, ComponentLink12URL=https://datasheet.octopart.com:443/C0805C180J5GACTU-Kemet-datasheet-5314837.pdf?src-supplier=Farnell, ComponentLink13Description=https://datasheet.octopart.com:443/C0805C180J5GACTU-Kemet-datasheet-8092359.pdf?src-supplier=Farnell, ComponentLink13URL=https://datasheet.octopart.com:443/C0805C180J5GACTU-Kemet-datasheet-8092359.pdf?src-supplier=Farnell, ComponentLink14Description=https://datasheet.octopart.com:443/C0805C180J5GACTU-Kemet-datasheet-5313890.pdf?src-supplier=Farnell, ComponentLink14URL=https://datasheet.octopart.com:443/C0805C180J5GACTU-Kemet-datasheet-5313890.pdf?src-supplier=Farnell, ComponentLink15Description=https://datasheet.octopart.com:443/C0805C180J5GACTU-Kemet-datasheet-5390537.pdf?src-supplier=Farnell, ComponentLink15URL=https://datasheet.octopart.com:443/C0805C180J5GACTU-Kemet-datasheet-5390537.pdf?src-supplier=Farnell, ComponentLink16Description=https://datasheet.octopart.com:443/C0805C180J5GACTU-Kemet-datasheet-5314969.pdf?src-supplier=Farnell, ComponentLink16URL=https://datasheet.octopart.com:443/C0805C180J5GACTU-Kemet-datasheet-5314969.pdf?src-supplier=Farnell, ComponentLink17Description=https://datasheet.octopart.com:443/C0805C180J5GACTU-Kemet-datasheet-5314627.pdf?src-supplier=Farnell, ComponentLink17URL=https://datasheet.octopart.com:443/C0805C180J5GACTU-Kemet-datasheet-5314627.pdf?src-supplier=Farnell, ComponentLink18Description=https://datasheet.octopart.com:443/C0805C180J5GACTU-Kemet-datasheet-5389132.pdf?src-supplier=Farnell, ComponentLink18URL=https://datasheet.octopart.com:443/C0805C180J5GACTU-Kemet-datasheet-5389132.pdf?src-supplier=Farnell, ComponentLink19Description=https://datasheet.octopart.com:443/C0805C180J5GACTU-Kemet-datasheet-5313836.pdf?src-supplier=Farnell, ComponentLink19URL=https://datasheet.octopart.com:443/C0805C180J5GACTU-Kemet-datasheet-5313836.pdf?src-supplier=Farnell, ComponentLink20Description=https://datasheet.octopart.com:443/C0805C180J5GACTU-Kemet-datasheet-8111010.pdf?src-supplier=Farnell, ComponentLink20URL=https://datasheet.octopart.com:443/C0805C180J5GACTU-Kemet-datasheet-8111010.pdf?src-supplier=Farnell, ComponentLink21Description=https://datasheet.octopart.com:443/C0805C180J5GACTU-Kemet-datasheet-7541751.pdf?src-supplier=Farnell, ComponentLink21URL=https://datasheet.octopart.com:443/C0805C180J5GACTU-Kemet-datasheet-7541751.pdf?src-supplier=Farnell, ComponentLink22Description=https://datasheet.octopart.com:443/C0805C180J5GACTU-Kemet-datasheet-7627733.pdf?src-supplier=Farnell, ComponentLink22URL=https://datasheet.octopart.com:443/C0805C180J5GACTU-Kemet-datasheet-7627733.pdf?src-supplier=Farnell, ComponentLink23Description=https://datasheet.octopart.com:443/C0805C180J5GACTU-Kemet-datasheet-500041.pdf?src-supplier=Farnell, ComponentLink23URL=https://datasheet.octopart.com:443/C0805C180J5GACTU-Kemet-datasheet-500041.pdf?src-supplier=Farnell, ComponentLink24Description=https://datasheet.octopart.com:443/C0805C180J5GACTU-Kemet-datasheet-5315946.pdf?src-supplier=Farnell, ComponentLink24URL=https://datasheet.octopart.com:443/C0805C180J5GACTU-Kemet-datasheet-5315946.pdf?src-supplier=Farnell, ComponentLink25Description=https://datasheet.octopart.com:443/C0805C180J5GACTU-Kemet-datasheet-5314449.pdf?src-supplier=Newark, ComponentLink25URL=https://datasheet.octopart.com:443/C0805C180J5GACTU-Kemet-datasheet-5314449.pdf?src-supplier=Newark, ComponentLink26Description=https://datasheet.octopart.com:443/C0805C180J5GACTU-KEMET-datasheet-170667456.pdf?src-supplier=Newark, ComponentLink26URL=https://datasheet.octopart.com:443/C0805C180J5GACTU-KEMET-datasheet-170667456.pdf?src-supplier=Newark, ComponentLink27Description=https://datasheet.octopart.com:443/C0805C180J5GACTU-KEMET-datasheet-37178240.pdf?src-supplier=Electro+Sonic, ComponentLink27URL=https://datasheet.octopart.com:443/C0805C180J5GACTU-KEMET-datasheet-37178240.pdf?src-supplier=Electro+Sonic, ComponentLink28Description=https://datasheet.octopart.com:443/C0805C180J5GACTU-Kemet-datasheet-67847120.pdf?src-supplier=TME, ComponentLink28URL=https://datasheet.octopart.com:443/C0805C180J5GACTU-Kemet-datasheet-67847120.pdf?src-supplier=TME, ComponentLink29Description=https://datasheet.octopart.com/C0805C180J5GACTU-KEMET-datasheet-84169754.pdf, ComponentLink29URL=https://datasheet.octopart.com/C0805C180J5GACTU-KEMET-datasheet-84169754.pdf, ComponentLink30Description=https://datasheet.octopart.com:443/C0805C180J5GAC7800-KEMET-datasheet-164857143.pdf?src-supplier=Burklin+Elektronik, ComponentLink30URL=https://datasheet.octopart.com:443/C0805C180J5GAC7800-KEMET-datasheet-164857143.pdf?src-supplier=Burklin+Elektronik, ComponentLink31Description=https://datasheet.octopart.com:443/C0805C180J5GAC-TU-Kemet-datasheet-7585144.pdf?src-supplier=Jameco, ComponentLink31URL=https://datasheet.octopart.com:443/C0805C180J5GAC-TU-Kemet-datasheet-7585144.pdf?src-supplier=Jameco, ComponentLink32Description=https://datasheet.octopart.com:443/C0805C180J5GACTU-Kemet-datasheet-464.pdf?src-supplier=RS+(Formerly+Allied+Electronics), ComponentLink32URL=https://datasheet.octopart.com:443/C0805C180J5GACTU-Kemet-datasheet-464.pdf?src-supplier=RS+(Formerly+Allied+Electronics), Contact Material=Tin, Depth=1.25mm, Dissipation Factor=0.1%, Height=780µm, Lead Free="Lead Free", Lead Pitch=750µm, Length=2mm, Lifecycle Status=Production, Manufacturer Part Number=C0805C180J5GACTU, Material=Ceramic, Mount="Surface Mount", Number of Pins=2, Number of Terminals=2, Packaging="Cut Tape", Pricing 1="1=0.11, 10=0.06, 50=0.0414, 100=0.0358, 500=0.0264, 1000=0.0235 (USD)", Radiation Hardening=No, REACH SVHC=Yes, RoHS=Compliant, Schedule B="8532240020, 8532240020|8532240020, 8532240020|8532240020|8532240020, 8532240020|8532240020|8532240020|8532240020", Stock 1=61365, Supplier 1=DigiKey, Termination=SMD/SMT, Thickness=889µm, Voltage Rating=50V, Voltage Rating (AC)=50V, Voltage Rating (DC)=50V, Width=1.25mm
D1: library part "LG L29K-G2J1-24-0-2-R18-Z", "LED Uni-Color Green 572nm 2-Pin Chip 0603(1608Metric) T/R", Manufacturer=Osram, Supplier Part Number 1=475-LGL29K-G2J1-24-0-2-R18-ZDKR-ND, Category=LEDs, Manufacturer Part Number="LG L29K-G2J1-24-0-2-R18-Z", Pricing 1="1=0.32, 10=0.219, 100=0.1543, 500=0.12508, 1000=0.11542, 2000=0.1072 (USD)", Stock 1=320963, Supplier 1=DigiKey
D2 D3 D4: library part "LO L29K-H2K1-24-0-2-R18-Z", "LED Uni-Color Orange 610nm Automotive 2-Pin Chip 0603(1608Metric) T/R", Manufacturer=Osram, Supplier Part Number 1=475-LOL29K-H2K1-24-ZCT-ND, Category=LEDs, Manufacturer Part Number="LO L29K-H2K1-24-0-2-R18-Z", Pricing 1="1=0.31, 10=0.213, 100=0.1501, 500=0.12158, 1000=0.11215, 2000=0.10413 (USD)", Schedule B=8541402000|8541402000|8541402000|8541402000|8541402000, Stock 1=45241, Supplier 1=DigiKey